# Altium PCB PCB1.PcbDoc (part 2 of 2)
Units mm, origin at the board's own origin, x right, y up, seen from the top; angles counter-clockwise.
Board outline 54 x 42.04 mm, 4 copper layers (Top Layer, Int1 (GND), Int2 (PWR), Bottom Layer), stack 1.527 mm thick; 51 components, 50 nets, 220 pads, 98 vias.
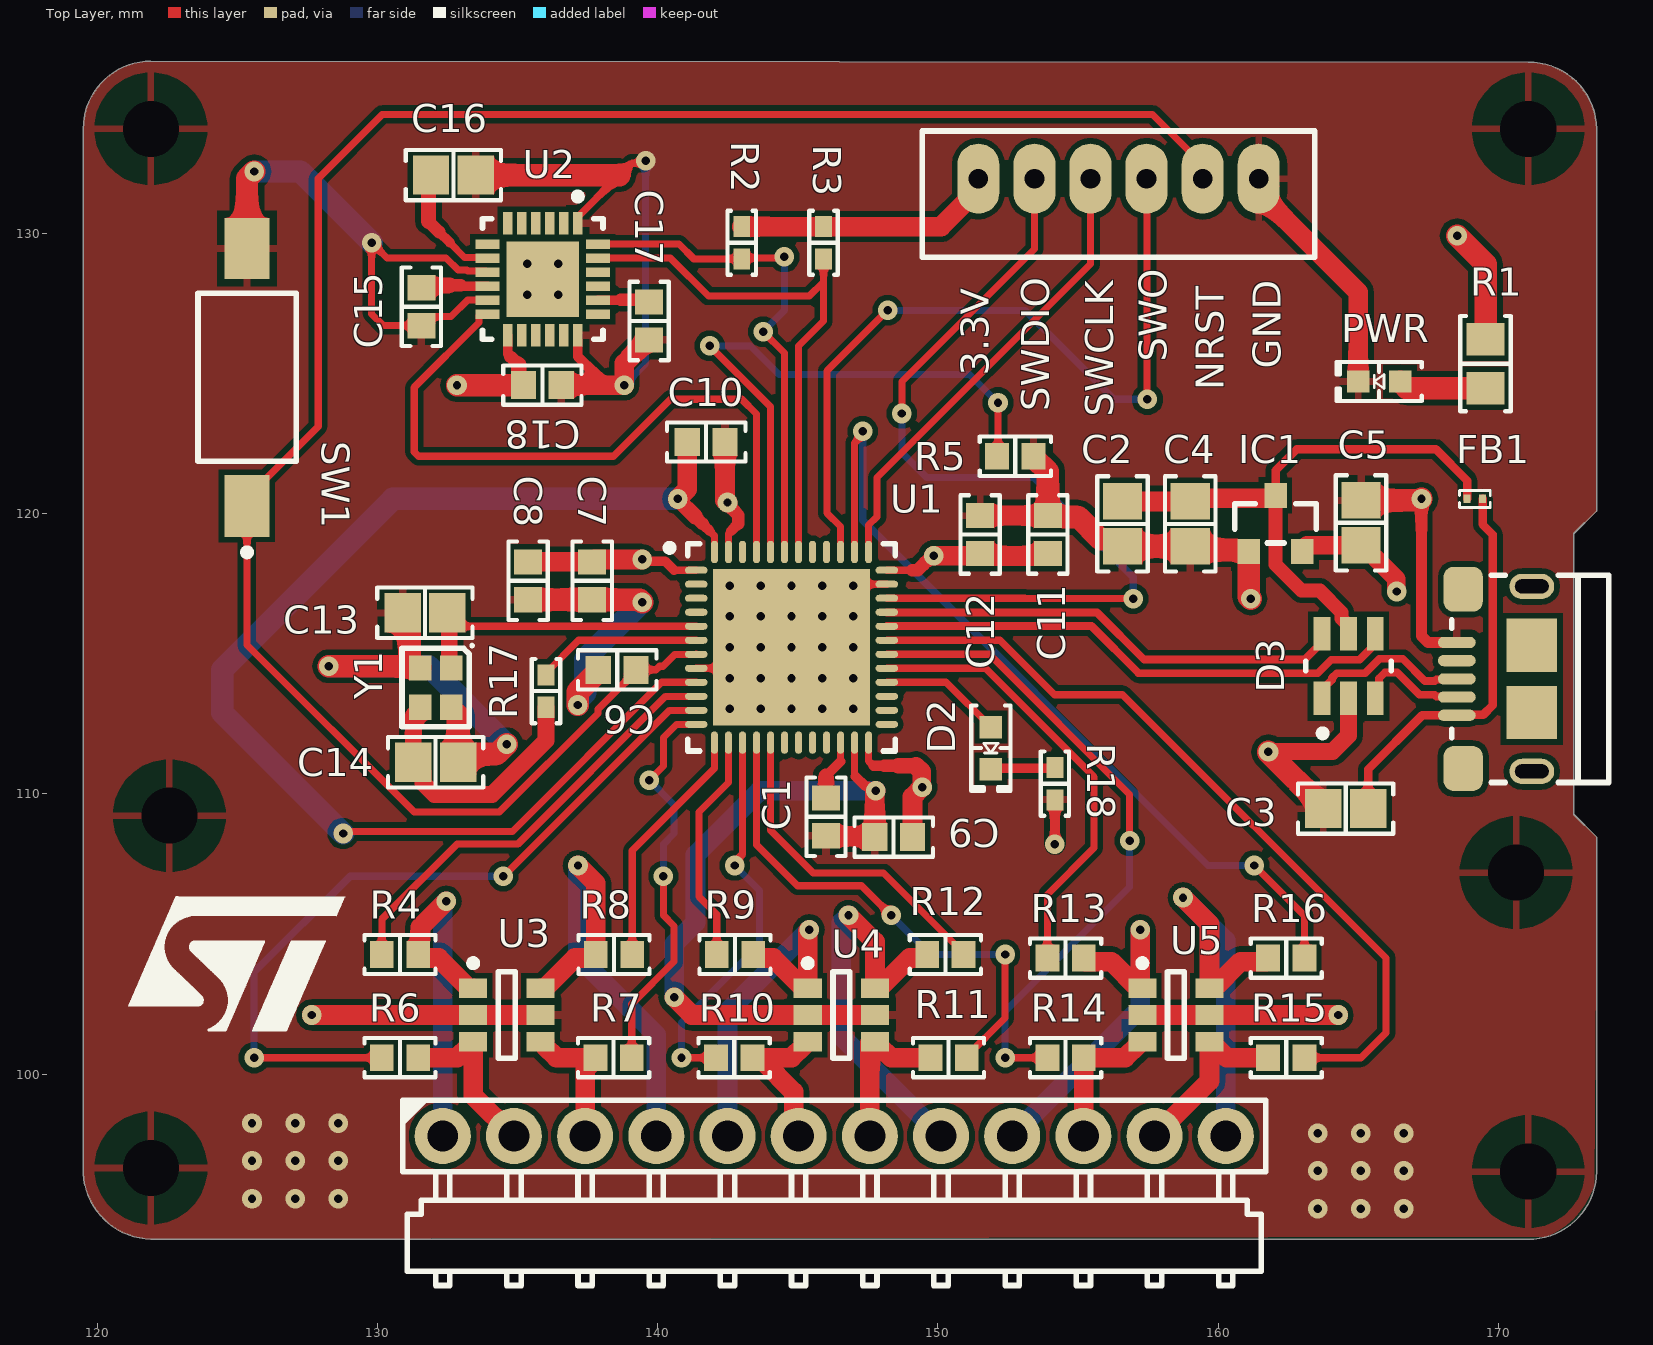
[diagram p0: Top Layer view]

## Via types
v1: diameter 0.7, hole 0.3, Top Layer to Bottom Layer, 98 vias

## Nets (pads, with @x,y where several pads share a name; then routed paths per layer and width w, separated by ;. In a path a pad name is that pad's centre, name@x,y a point inside that pad or via, vN(x,y) a via of type N, cw(c..) or ccw(c..) an arc to the next point about the centre after c; other vN are vias at no path point) (continued)
NetJ2_12: J2.12 R16.1 U5.6 | length 15.3
  Top Layer w0.7: v1(158.75,106.299) 159.696,105.353 U5.6 159.846,103.058 160.803,104.015 161.708,104.015 161.783,104.09 R16.1
  Bottom Layer w0.7: v1(158.75,106.299) 160.274,104.775 J2.12
NRST: C6.1 J3.5 SW1.1 U1.7 | length 72.4
  Top Layer w0.254: U1.7 141.378,114.978 140.614,114.978 140.19,114.554 140.074,114.554 139.947,114.427 C6.1 139.232,114.377 137.874,113.019 137.874,112.869 134.353,109.348 131.315,109.348 125.349,115.314 SW1.1 125.349,120.569 127.889,123.109 127.889,131.953 130.175,134.239 157.662,134.239 159.448,132.453 J3.5
OSC_IN: C13.1 U1.5 Y1.1 | length 11
  Top Layer w0.254: C13.1@132.564,116.394 132.978,115.98 U1.5
  Top Layer w0.6: C13.1 132.564,116.394 132.564,114.558 Y1.1
OSC_OUT: R17.2 U1.6 | length 5.9
  Top Layer w0.254: R17.2 136.017,114.315 137.182,115.48 U1.6
PA0MCU: R4.2 U1.10 | length 15.8
  Top Layer w0.254: R4.2 130.16,105.522 132.842,108.204 135.008,108.204 140.284,113.48 U1.10
PA1MCU: R6.2 U1.11 | length 27.3
  Top Layer w0.254: v1(125.603,100.584) R6.2 ; v1(134.493,107.061) 134.507,107.061 140.426,112.98 U1.11
  Bottom Layer w0.254: v1(125.603,100.584) 125.603,103.632 129.032,107.061 v1(134.493,107.061)
PA2MCU: R7.2 U1.12 | length 14.3
  Top Layer w0.254: R7.2 139.08,102.504 140.589,104.013 140.589,105.286 140.208,105.667 v1(140.208,107.061) ; v1(139.7,110.49) 140.208,110.998 140.208,112.014 140.674,112.48 U1.12
  Bottom Layer w0.254: v1(139.7,110.49) 140.589,109.601 140.589,108.582 140.208,108.201 v1(140.208,107.061)
PA3MCU: R8.2 U1.13 | length 8.8
  Top Layer w0.254: R8.2 139.095,107.98 142.03,110.915 U1.13
PA4MCU: R9.2 U1.14 | length 8.3
  Top Layer w0.254: R9.2 142.113,105.696 141.478,106.331 141.478,109.347 142.53,110.399 U1.14
PA5MCU: R10.2 U1.15 | length 14.1
  Top Layer w0.254: v1(140.854,100.584) R10.2 ; v1(142.748,107.442) 142.748,107.563 143.03,107.845 U1.15
  Bottom Layer w0.254: v1(140.854,100.584) 140.854,101.843 143.637,104.626 143.637,106.553 v1(142.748,107.442)
PA6MCU: R11.2 U1.16 | length 18.4
  Top Layer w0.254: U1.16 143.53,108.184 144.992,106.722 147.278,106.722 v1(148.336,105.664) ; R11.2 151.033,100.634 152.4,102.001 v1(152.4,104.267)
  Bottom Layer w0.254: v1(148.336,105.664) 149.733,104.267 v1(152.4,104.267)
PA7MCU: R12.2 U1.17 | length 11.9
  Top Layer w0.254: U1.17 144.03,108.7 145.554,107.176 148.062,107.176 150.921,104.317 R12.2
PA8MCU: R13.2 U1.29 | length 16.2
  Top Layer w0.254: U1.29 151.703,114.48 155.575,110.608 155.575,108.077 153.909,106.411 R13.2
PA9MCU: R14.2 U1.30 | length 23.5
  Top Layer w0.254: U1.30 151.845,114.98 156.845,109.98 v1(156.845,108.331) ; v1(152.4,100.584) R14.2
  Bottom Layer w0.254: v1(152.4,100.584) 152.4,102.235 156.845,106.68 v1(156.845,108.331)
PA10MCU: R15.2 U1.31 | length 28.4
  Top Layer w0.254: U1.31 152.22,115.48 154.162,113.538 156.591,113.538 165.989,104.14 165.989,101.473 165.1,100.584 R15.2
PA15MCU: R16.2 U1.38 | length 30.7
  Top Layer w0.254: U1.38 147.03,122.525 147.32,122.815 v1(147.32,122.936) ; v1(161.29,107.442) 163.083,105.649 R16.2
  Bottom Layer w0.254: v1(147.32,122.936) 147.32,119.761 159.639,107.442 v1(161.29,107.442)
REGOUT: C15.1 U2.10 | length 2.4
  Top Layer w0.35: 132.969,128.143 132.997,128.115 U2.10
  Top Layer w0.45: 132.588,128.143 132.969,128.143
  Top Layer w0.55: C15.1 131.659,128.143 132.588,128.143
SWCLK: J3.3 U1.37 | length 16.6
  Top Layer w0.254: U1.37 147.53,119.59 147.828,119.888 147.828,121.285 155.448,128.905 J3.3
SWDIO: J3.2 U1.34 | length 31.4
  Top Layer w0.254: U1.34 153.11,116.98 153.123,116.967 v1(156.972,116.967) ; v1(148.717,123.571) 148.717,124.714 153.448,129.445 J3.2
  Bottom Layer w0.254: v1(148.717,123.571) 148.717,122.174 149.606,121.285 153.416,121.285 156.972,117.729 v1(156.972,116.967)
SWO: J3.4 U1.39 | length 28.2
  Top Layer w0.254: U1.39 146.53,119.535 146.05,120.015 146.05,125.095 v1(148.209,127.254) ; J3.4 157.464,131.937 157.464,124.095 v1(157.48,124.079)
  Bottom Layer w0.254: v1(148.209,127.254) 153.109,127.254 156.284,124.079 v1(157.48,124.079)
USB_D_IN_N: D3.3 J1.2 | length 4
  Top Layer w0.282: D3.3 165.749,113.552 165.749,114.122 165.962,114.334 166.388,114.334 167.188,113.535 167.732,113.535 167.792,113.476 168.498,113.476 J1.2
USB_D_IN_P: D3.1 J1.3 | length 6
  Top Layer w0.282: D3.1 163.708,113.711 164.066,114.069 164.066,114.131 164.237,114.302 165.243,114.302 165.761,114.82 166.59,114.82 167.389,114.021 167.732,114.021 167.792,114.08 168.498,114.08 J1.3
USB_D_N: D3.4 U1.32 | length 18.9
  Top Layer w0.282: U1.32 148.187,115.987 155.481,115.987 157.166,114.302 163.555,114.302 164.038,114.784 165.043,114.784 165.449,115.19 165.449,115.552 D3.4
USB_D_P: D3.6 U1.33 | length 16.8
  Top Layer w0.282: U1.33 148.187,116.473 155.682,116.473 157.367,114.788 163.085,114.788 163.708,115.411 D3.6
VCAP1: C1.1 U1.22 | length 2.2
  Top Layer w0.254: 146.528,111.153 146.53,111.155 U1.22
  Top Layer w0.35: 146.01,110.633 146.01,110.635 146.528,111.153
  Top Layer w0.55: C1.1 146.01,110.633
pads on no net: J1.4 J1.S U1.2 U1.3 U1.4 U1.18 U1.19 U1.20 U1.21 U1.25 U1.26 U1.27 U1.40 U1.41 U1.46 U2.2 U2.3 U2.4 U2.5 U2.6 U2.7 U2.14 U2.15 U2.16 U2.17 U2.19 U2.21 U2.22 U2.25
copper on no net:
  other v1: 135.352,127.815 136.452,127.815 135.352,128.915 136.452,128.915

## Polygon pours and split planes (outlines as drawn)
GND on Bottom Layer "GND_L04_P005" (solid, pour order 5): 170.993,136.093 cw(c171.031,136.055) 171.069,136.093 cw(c171.082,133.668) 173.507,133.68 173.507,120.091 172.695,119.278 172.695,109.271 173.507,108.458 173.507,96.52 cw(c171.116,96.52) 172.807,94.829 172.803,94.825 cw(c171.069,96.56) 170.717,94.132 122.405,94.132 cw(c122.047,96.647) 119.507,96.647 119.558,133.528 cw(c122.097,133.478) 122.149,136.017
GND on Top Layer "GND_L01_P002" (solid, pour order 2): 171.069,136.107 cw(c171.049,133.58) 172.788,135.414 cw(c171.033,133.671) 173.507,133.67 173.507,120.091 172.695,119.278 172.695,109.271 173.507,108.458 173.431,96.088 cw(c170.55,96.973) 171.703,94.188 121.985,94.106 cw(c121.983,96.583) 119.507,96.647 119.507,133.731 cw(c121.917,133.734) 121.944,136.144
+3.3 on Int2 (PWR) (split plane): 121.92,135.634 171.069,135.597 171.076,135.598 171.086,135.599 171.1,135.599 171.286,135.59 171.47,135.563 171.651,135.517 171.827,135.455 171.995,135.375 172.155,135.279 172.305,135.168 172.443,135.043 172.568,134.905 172.679,134.755 172.775,134.595 172.854,134.427 172.917,134.251 172.962,134.071 172.99,133.886 172.997,133.737 172.997,133.731 172.997,120.302 172.334,119.639 172.27,119.562 172.223,119.474 172.194,119.378 172.184,119.278 172.184,109.271 172.194,109.171 172.223,109.075 172.27,108.987 172.334,108.91 172.997,108.247 172.997,96.52 172.998,96.509 172.99,96.345 172.962,96.158 172.916,95.976 172.853,95.799 172.772,95.629 172.676,95.467 172.564,95.316 172.437,95.177 172.298,95.05 172.147,94.938 171.985,94.842 171.815,94.761 171.638,94.698 171.456,94.652 171.269,94.624 171.088,94.616 171.069,94.617 121.92,94.617 121.79,94.624 121.599,94.652 121.412,94.699 121.23,94.764 121.055,94.847 120.889,94.946 120.734,95.061 120.591,95.191 120.461,95.334 120.346,95.49 120.247,95.655 120.164,95.83 120.099,96.012 120.052,96.199 120.024,96.39 120.014,96.584 120.017,96.634 120.016,96.634 120.017,96.647 120.017,133.731 120.016,133.746 120.024,133.918 120.052,134.103 120.097,134.284 120.16,134.46 120.24,134.629 120.336,134.789 120.448,134.939 120.573,135.078 120.712,135.203 120.862,135.315 121.022,135.411 121.191,135.491 121.367,135.554 121.548,135.599 121.733,135.627 121.905,135.635
GND on Int1 (GND) (split plane): 121.92,135.634 171.069,135.597 171.076,135.598 171.086,135.599 171.1,135.599 171.286,135.59 171.47,135.563 171.651,135.517 171.827,135.455 171.995,135.375 172.155,135.279 172.305,135.168 172.443,135.043 172.568,134.905 172.679,134.755 172.775,134.595 172.854,134.427 172.917,134.251 172.962,134.071 172.99,133.886 172.997,133.737 172.997,133.731 172.997,120.302 172.334,119.639 172.27,119.562 172.223,119.474 172.194,119.378 172.184,119.278 172.184,109.271 172.194,109.171 172.223,109.075 172.27,108.987 172.334,108.91 172.997,108.247 172.997,96.52 172.998,96.509 172.99,96.345 172.962,96.158 172.916,95.976 172.853,95.799 172.772,95.629 172.676,95.467 172.564,95.316 172.437,95.177 172.298,95.05 172.147,94.938 171.985,94.842 171.815,94.761 171.638,94.698 171.456,94.652 171.269,94.624 171.088,94.616 171.069,94.617 121.92,94.617 121.79,94.624 121.599,94.652 121.412,94.699 121.23,94.764 121.055,94.847 120.889,94.946 120.734,95.061 120.591,95.191 120.461,95.334 120.346,95.49 120.247,95.655 120.164,95.83 120.099,96.012 120.052,96.199 120.024,96.39 120.014,96.584 120.017,96.634 120.016,96.634 120.017,96.647 120.017,133.731 120.016,133.746 120.024,133.918 120.052,134.103 120.097,134.284 120.16,134.46 120.24,134.629 120.336,134.789 120.448,134.939 120.573,135.078 120.712,135.203 120.862,135.315 121.022,135.411 121.191,135.491 121.367,135.554 121.548,135.599 121.733,135.627 121.905,135.635

## Silkscreen, mask and mechanical layers (free items; w line width, h text height)
Top Overlay:
  drawing of 3 lines, arcs and shapes, not listed
  text "SWO" at 158.169,125.422 h1 r90
  text "GND" at 162.233,125.168 h1 r90
  text "3.3V" at 151.819,124.914 h1 r90
  text "NRST" at 160.201,124.406 h1 r90
  text "SWDIO" at 153.978,123.644 h1 r90
  text "SWCLK" at 156.258,123.457 h1 r90
Mechanical 13:
  the board outline again, w0.254